# Altium PCB tabdil motor2.PcbDoc
Units mm, origin at the board's own origin, x right, y up, seen from the top; angles counter-clockwise.
Board outline 152.4 x 101.6 mm, 2 copper layers (Top Layer, Bottom Layer); 2 components, 8 nets, 28 pads, 12 vias.
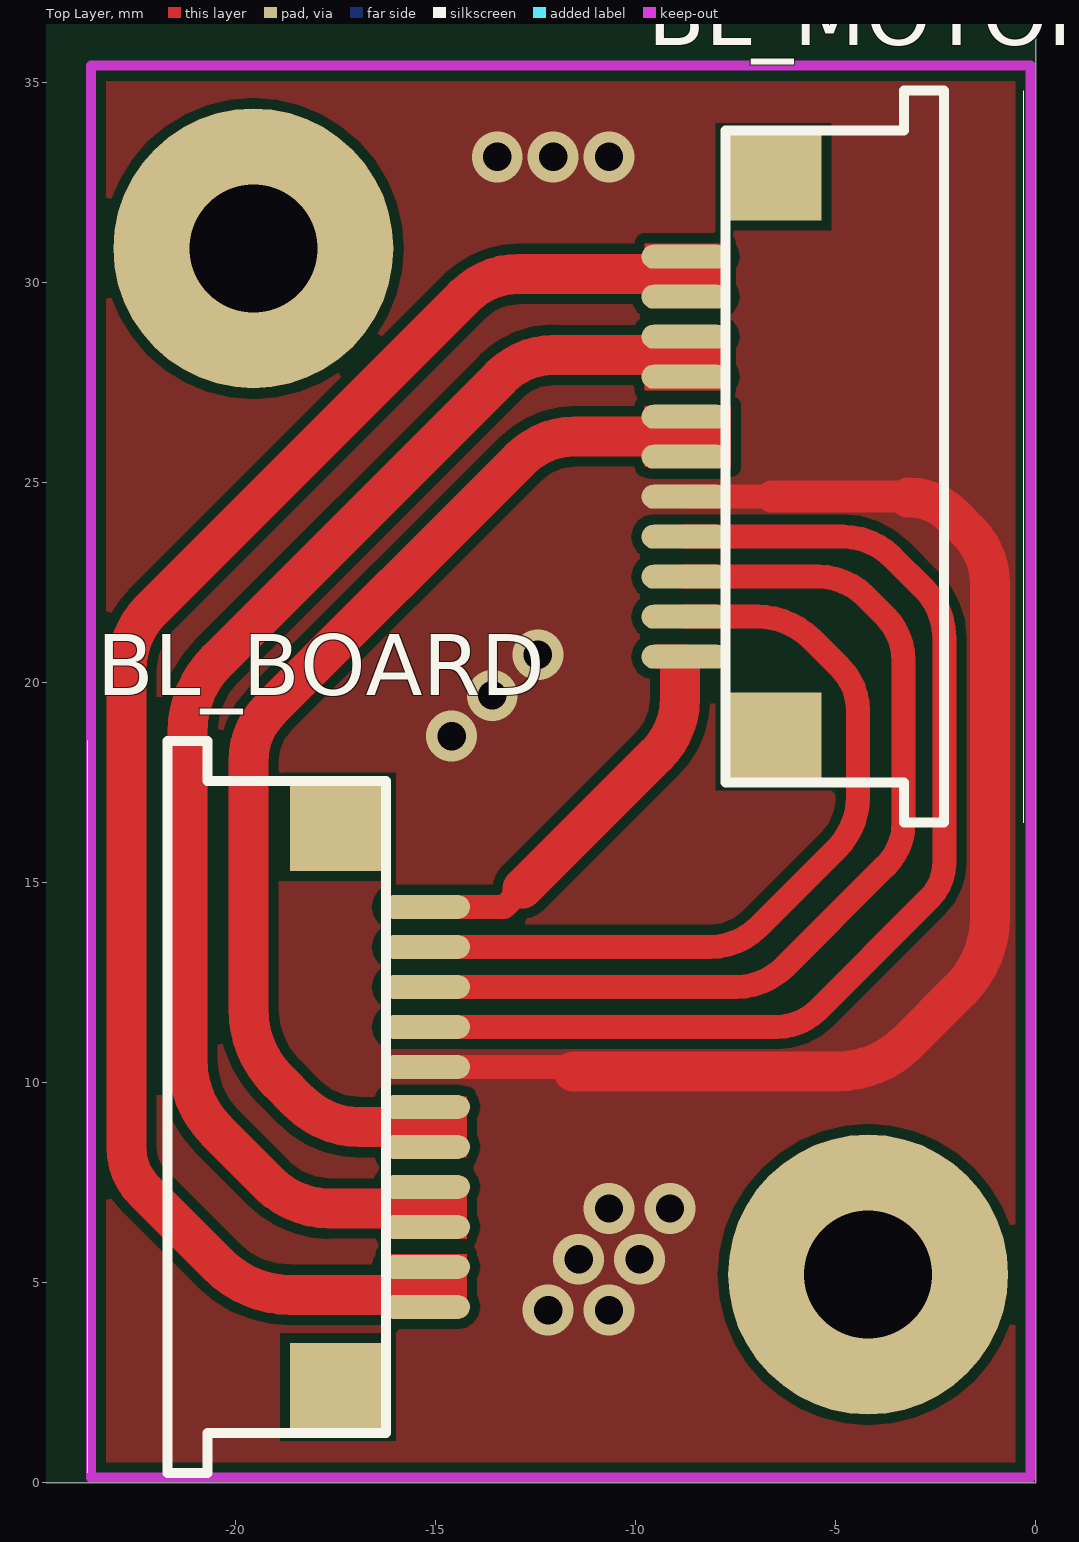
[diagram p0: Top Layer view]
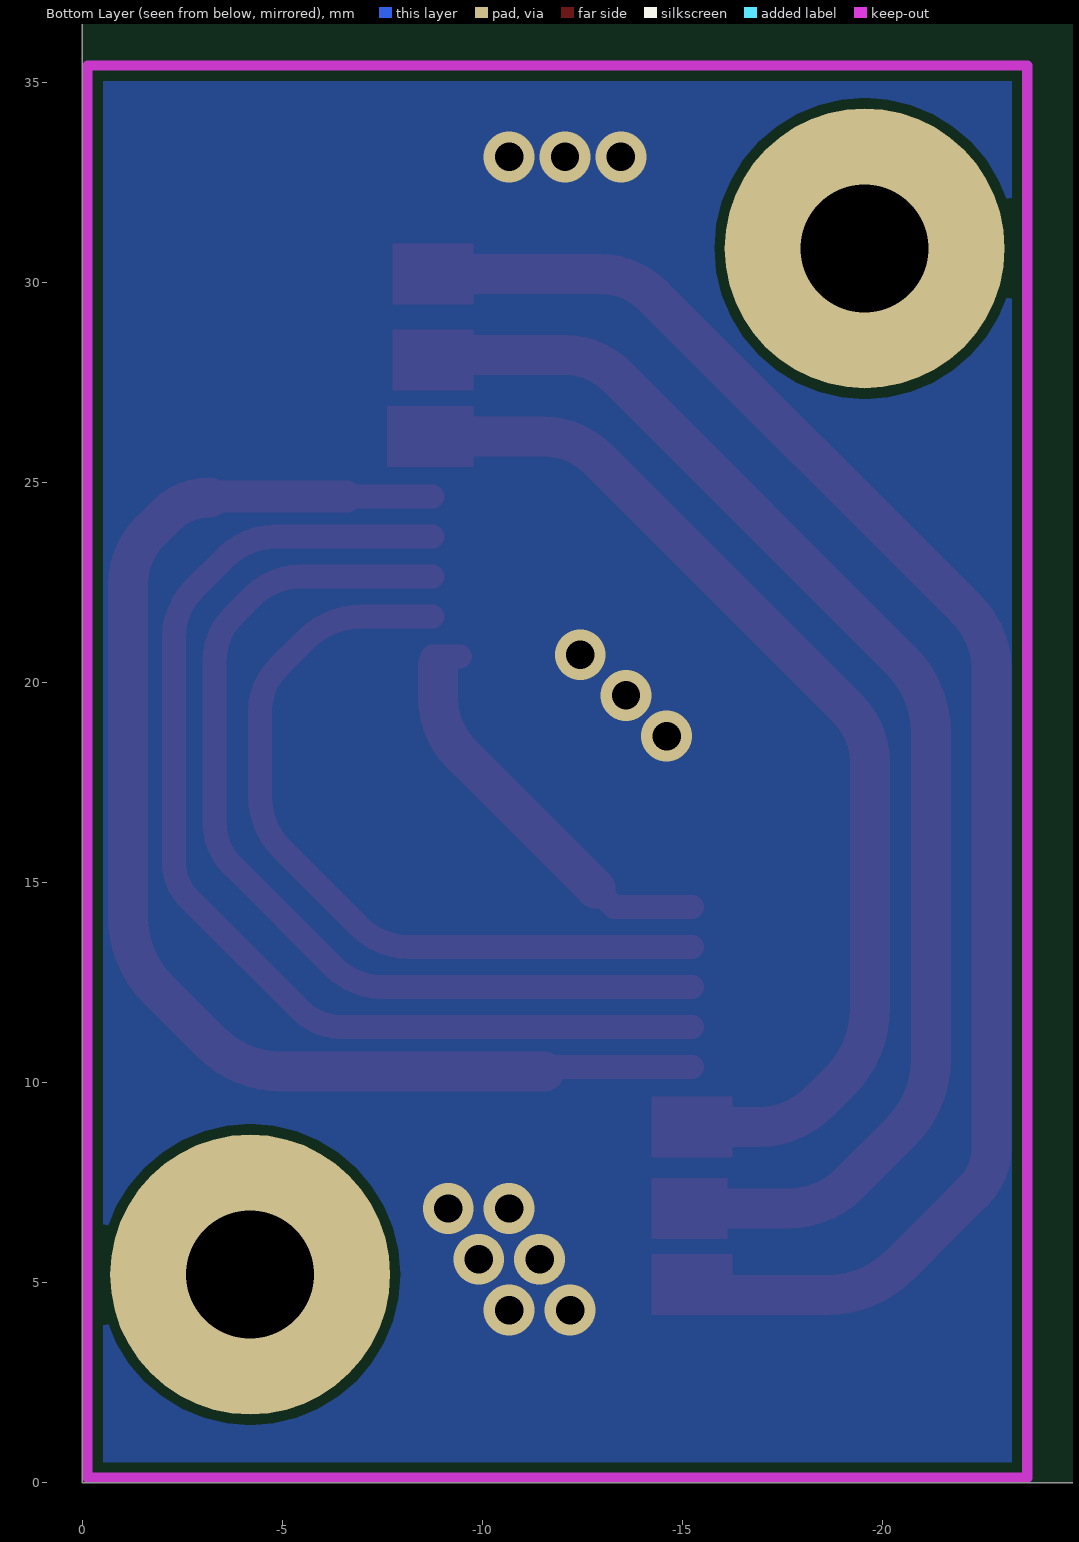
[diagram p1: Bottom Layer view, seen from below]

## Layer stack, top to bottom
Top Layer: signal copper 0.0356
Dielectric: dielectric 0.32, FR-4, Dk 4.8
Bottom Layer: signal copper 0.0356

## Board outline
-152.4,0 0,0 0,101.6 -152.4,101.6

## Design rules (kind name [scope] priority, off if disabled: settings)
Clearance [All] p1: gap=0.254
PlaneClearance [All] p1: clearance=0.8
PolygonConnect [All] p1: connectstyle=Direct reliefconductorwidth=0.254 reliefentries=4 polygonreliefangle="90 Angle" airgapwidth=0.254
RoutingVias [All] p1: holewidth=0.711 width=1.27 viastyle="Through Hole" minholewidth=0.711 minwidth=1.27 maxholewidth=0.711 maxwidth=1.27
SolderMaskExpansion [All] p1: expansion=0.102
Width [All] p1: maxlimit=2 minlimit=0.254 preferedwidth=1 minimp=50.000000 maximp=50.000000 favimp=50.000000
27 further rules are at their usual default settings.

## Components (designator, comment, footprint, x,y, rotation, side; value= is the part's Value field where it differs from the comment)
BL_BOARD "BLDC" FLT11 -17.145,9.398 r90 top
BL_MOTOR "BLDC" FLT11 -6.858,25.654 r270 top

## Footprints (in the part's own frame and the unit in brackets; to place one, negate y for a bottom-side part, rotate by r counter-clockwise, add the part's x,y. Pads: shape width x height; smd on the part's side, far side on the other; paste and mask are expansions set on the pad)
FLT11 [mm]
  rect 2.2x2.4 smd: 0(-7,0.3) 0(7,0.3)
  oval 0.6x2.2 smd: 1(-5,-1.9) 2(-4,-1.9) 3(-3,-1.9) 4(-2,-1.9) 5(-1,-1.9) 6(0,-1.9) 7(1,-1.9) 8(2,-1.9) 9(3,-1.9) 10(4,-1.9) 11(5,-1.9)
  silkscreen extent -9.15,-0.9 9.15,6.56, body extent -9.15,-0.9 9.15,4.6, height 3

## Free pads (board coordinates)
  round 7 hole 3.2: 0(-19.558,30.861) 0(-4.191,5.207)

## Via types
v1: diameter 1.27, hole 0.711, Top Layer to Bottom Layer, 12 vias

## Nets (pads, with @x,y where several pads share a name; then routed paths per layer and width w, separated by ;. In a path a pad name is that pad's centre, name@x,y a point inside that pad or via, vN(x,y) a via of type N, cw(c..) or ccw(c..) an arc to the next point about the centre after c; other vN are vias at no path point)
5V: BL_BOARD.11 BL_MOTOR.11 | length 10.4
  Top Layer w0.6: BL_BOARD.11 -13.288,14.398 -12.827,14.859 ; BL_MOTOR.11@-9.445,20.654 BL_MOTOR.11
  Top Layer w1: -12.827,14.859 -9.652,18.034 -9.474,18.212 ccw(c-10.883,19.621) -8.89,19.621 BL_MOTOR.11@-8.89,20.447
AGND: BL_BOARD.7 BL_MOTOR.7 | length 33.3
  Top Layer w0.6: BL_BOARD.7 -11.668,10.398 -11.557,10.287 ; BL_MOTOR.7 -6.588,24.654
  Top Layer w0.8: -6.588,24.654 -3.191,24.654 -3.175,24.638
  Top Layer w1: -11.557,10.287 -4.953,10.287 ccw(c-4.953,12.74) -3.219,11.005 -1.887,12.337 ccw(c-3.683,14.133) -1.143,14.133 -1.143,22.479 ccw(c-2.983,22.479) -1.682,23.78 -2.091,24.189 ccw(c-3.175,23.105) -3.175,24.638
  other v1: -12.192,4.318 -10.668,4.318 -11.43,5.588 -9.906,5.588 -10.668,6.858 -9.144,6.858 -14.605,18.669 -13.589,19.685 -12.446,20.701 -13.462,33.147 -12.065,33.147 -10.668,33.147
HALL1: BL_BOARD.9 BL_MOTOR.9 | length 24.5
  Top Layer w0.6: BL_BOARD.9 -7.493,12.398 ccw(c-7.493,14.122) -6.275,12.902 ; BL_MOTOR.9 -5.444,22.654 cw(c-5.444,20.972) -4.255,22.161 -3.778,21.685 cw(c-4.928,20.535) -3.302,20.535 -3.302,16.51 cw(c-4.835,16.51) -3.751,15.426 -3.874,15.303 -6.274,12.903
HALL2: BL_BOARD.8 BL_MOTOR.8 | length 28.3
  Top Layer w0.6: BL_BOARD.8 -6.477,11.398 ccw(c-6.477,12.854) -5.448,11.824 ; BL_MOTOR.8 -4.826,23.654 cw(c-4.826,21.892) -3.58,23.138 -2.794,22.352 cw(c-4.02,21.126) -2.286,21.126 -2.286,15.494 cw(c-3.512,15.494) -2.645,14.627 ; -5.448,11.824 -2.794,14.478 -2.645,14.627
HALL3: BL_BOARD.10 BL_MOTOR.10 | length 20.3
  Top Layer w0.6: BL_BOARD.10 -8.149,13.398 ccw(c-8.149,15.134) -6.922,13.906 -4.984,15.844 ccw(c-6.285,17.145) -4.445,17.145 -4.445,19.304 ccw(c-5.978,19.304) -4.894,20.388 -5.588,21.082 ccw(c-6.969,19.701) -5.589,21.083 ccw(c-6.969,19.701) -6.969,21.654 BL_MOTOR.10
MW1: BL_BOARD.1 BL_BOARD.2 BL_MOTOR.1 BL_MOTOR.2 | length 39.3
  Top Layer w1: -22.105,21.837 ccw(c-20.587,20.32) -22.733,20.32 -22.733,8.382 ccw(c-21.2,8.382) -22.284,7.298 -21.59,6.604 -20.429,5.443 ccw(c-18.633,7.239) -18.633,4.699 -15.24,4.699 ; -22.104,21.838 -14.287,29.654 cw(c-12.908,28.275) -12.908,30.226 -9.017,30.226
MW2: BL_BOARD.3 BL_BOARD.4 BL_MOTOR.3 BL_MOTOR.4 | length 33
  Top Layer w1: -19.171,7.487 -20.465,8.781 cw(c-18.669,10.577) -21.209,10.577 -21.209,18.76 cw(c-18.669,18.76) -20.465,20.556 -13.366,27.655 cw(c-12.065,26.354) -12.065,28.194 -8.509,28.194 ; -19.17,7.486 ccw(c-17.653,9.004) -17.653,6.858 -15.367,6.858
MW3: BL_BOARD.5 BL_BOARD.6 BL_MOTOR.5 BL_MOTOR.6 | length 26.7
  Top Layer w1: -18.409,9.519 -18.941,10.051 cw(c-17.145,11.847) -19.685,11.847 -19.685,18.034 cw(c-17.845,18.034) -19.146,19.335 -12.89,25.59 cw(c-11.511,24.211) -11.511,26.162 -8.763,26.162 ; -18.408,9.518 ccw(c-16.891,11.036) -16.891,8.89 -15.367,8.89
pads on no net: BL_BOARD.0 BL_MOTOR.0

## Polygon pours and split planes (outlines as drawn)
AGND on Top Layer "Bottom Layer-No Net" (solid, pour order 2): -23.429,35.233 cw(c-23.253,35.057) -23.253,35.306 -0.381,35.306 cw(c-0.688,34.999) -0.254,34.999 -0.254,0.508 cw(c-0.561,0.815) -0.561,0.381 -23.368,0.381 cw(c-23.061,0.688) -23.495,0.688 -23.495,35.179
AGND on Bottom Layer "Bottom Layer-No Net" (solid, pour order 4): -23.622,35.433 -0.127,35.433 -0.127,0.127 -23.622,0.127 -23.622,35.433

## Keep-outs
Keep-Out Layer:
  lines w0.254: -23.622,0.127 -0.127,0.127 -0.127,35.433 -23.622,35.433 -23.622,0.127

## Other copper
Top Layer:
  rectangle net MW3: -9.779,25.4 -7.62,26.924
  rectangle net MW2: -9.779,27.305 -7.747,28.829
  rectangle net MW1: -9.779,29.464 -7.747,30.988
  rectangle net MW1: -16.256,4.191 -14.224,5.715
  rectangle net MW2: -16.129,6.096 -14.224,7.62
  rectangle net MW3: -16.256,8.128 -14.224,9.652

## Silkscreen, mask and mechanical layers (free items; w line width, h text height)
Top Solder:
  rectangle: -16.256,4.064 -14.224,5.588
  rectangle: -16.256,5.969 -14.224,7.493
  rectangle: -16.129,8.001 -14.224,9.652
  rectangle: -9.779,25.4 -7.747,26.924
  rectangle: -9.779,27.305 -7.747,28.829
  rectangle: -9.652,29.337 -7.747,30.988